# Altium PCB PCB1.PcbDoc
Units mm, origin at the board's own origin, x right, y up, seen from the top; angles counter-clockwise.
Board outline 179.79 x 227.7 mm, 2 copper layers (Top Layer, Bottom Layer); 40 components, 37 nets, 162 pads, 46 vias.
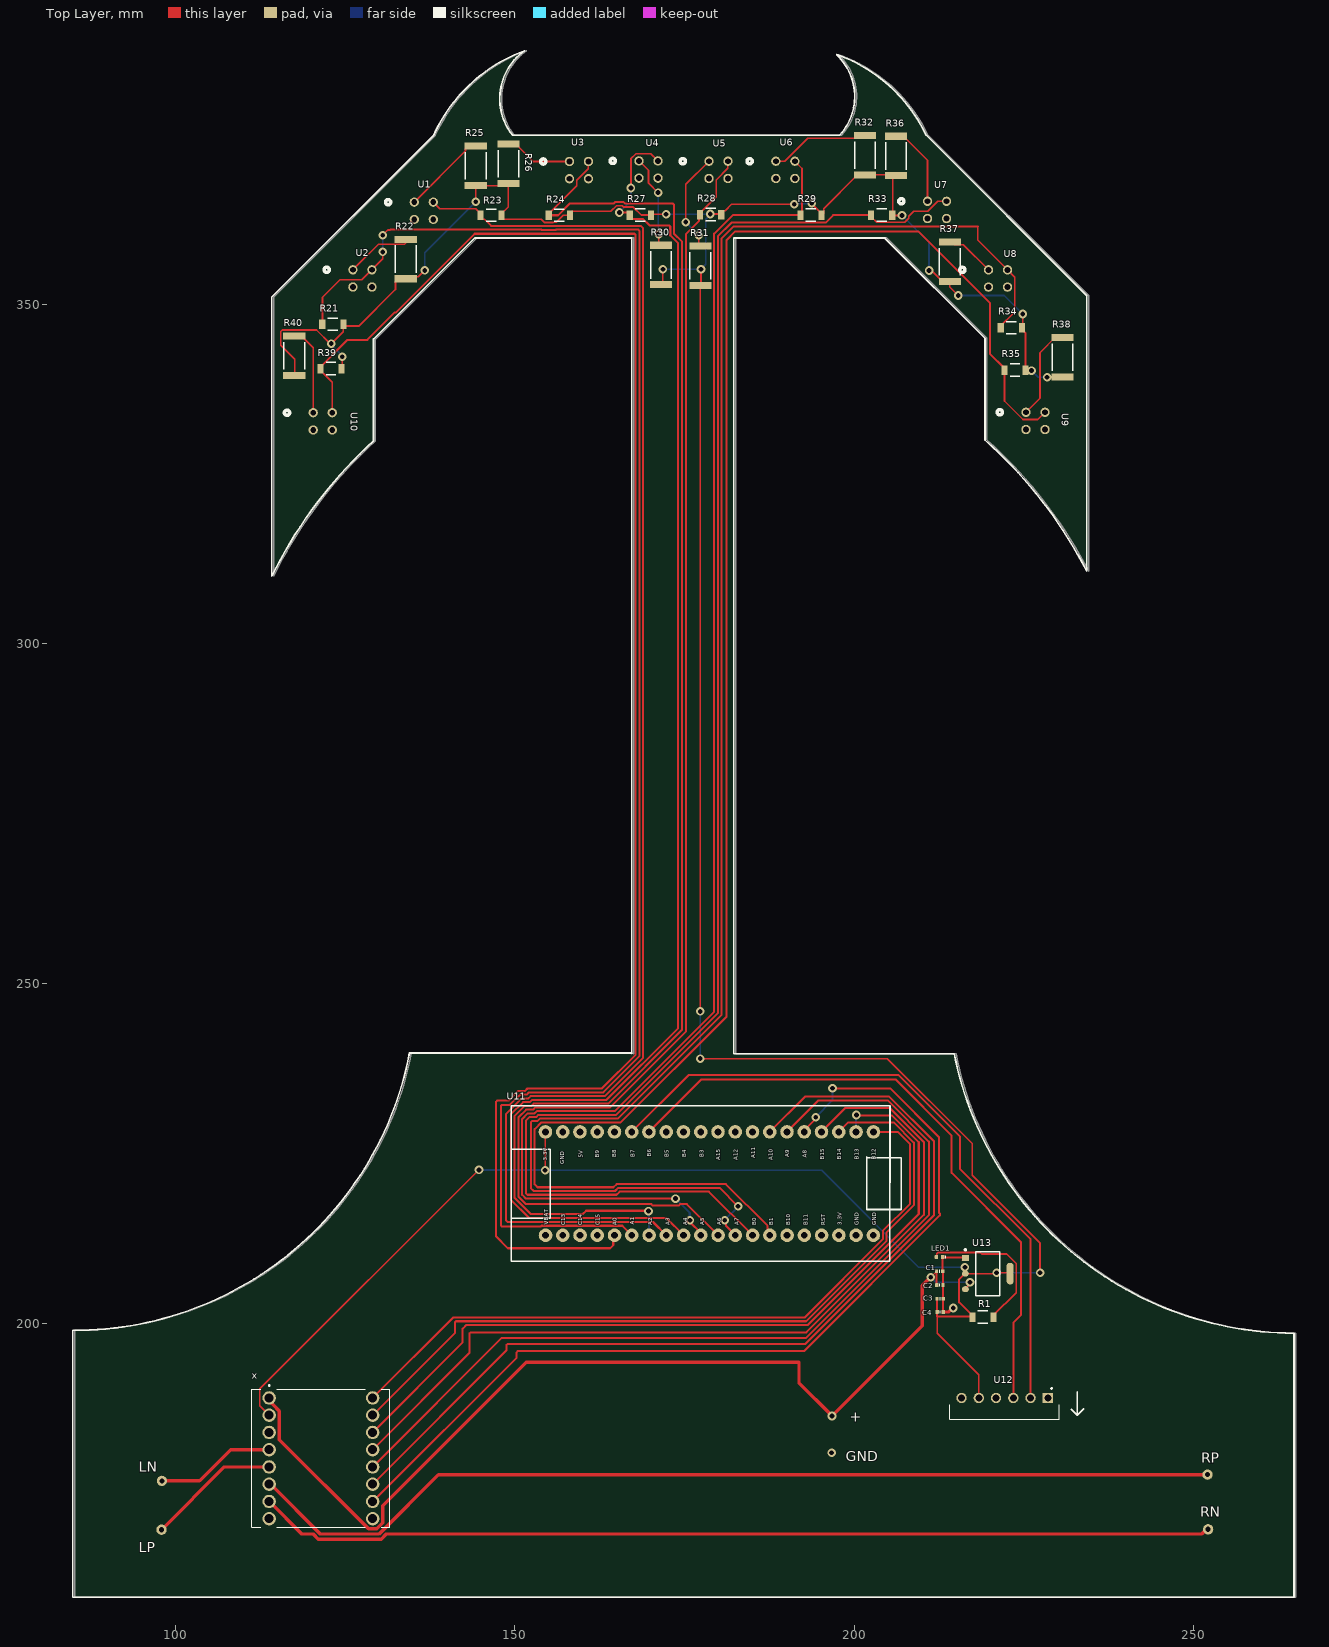
[diagram p0: Top Layer view]
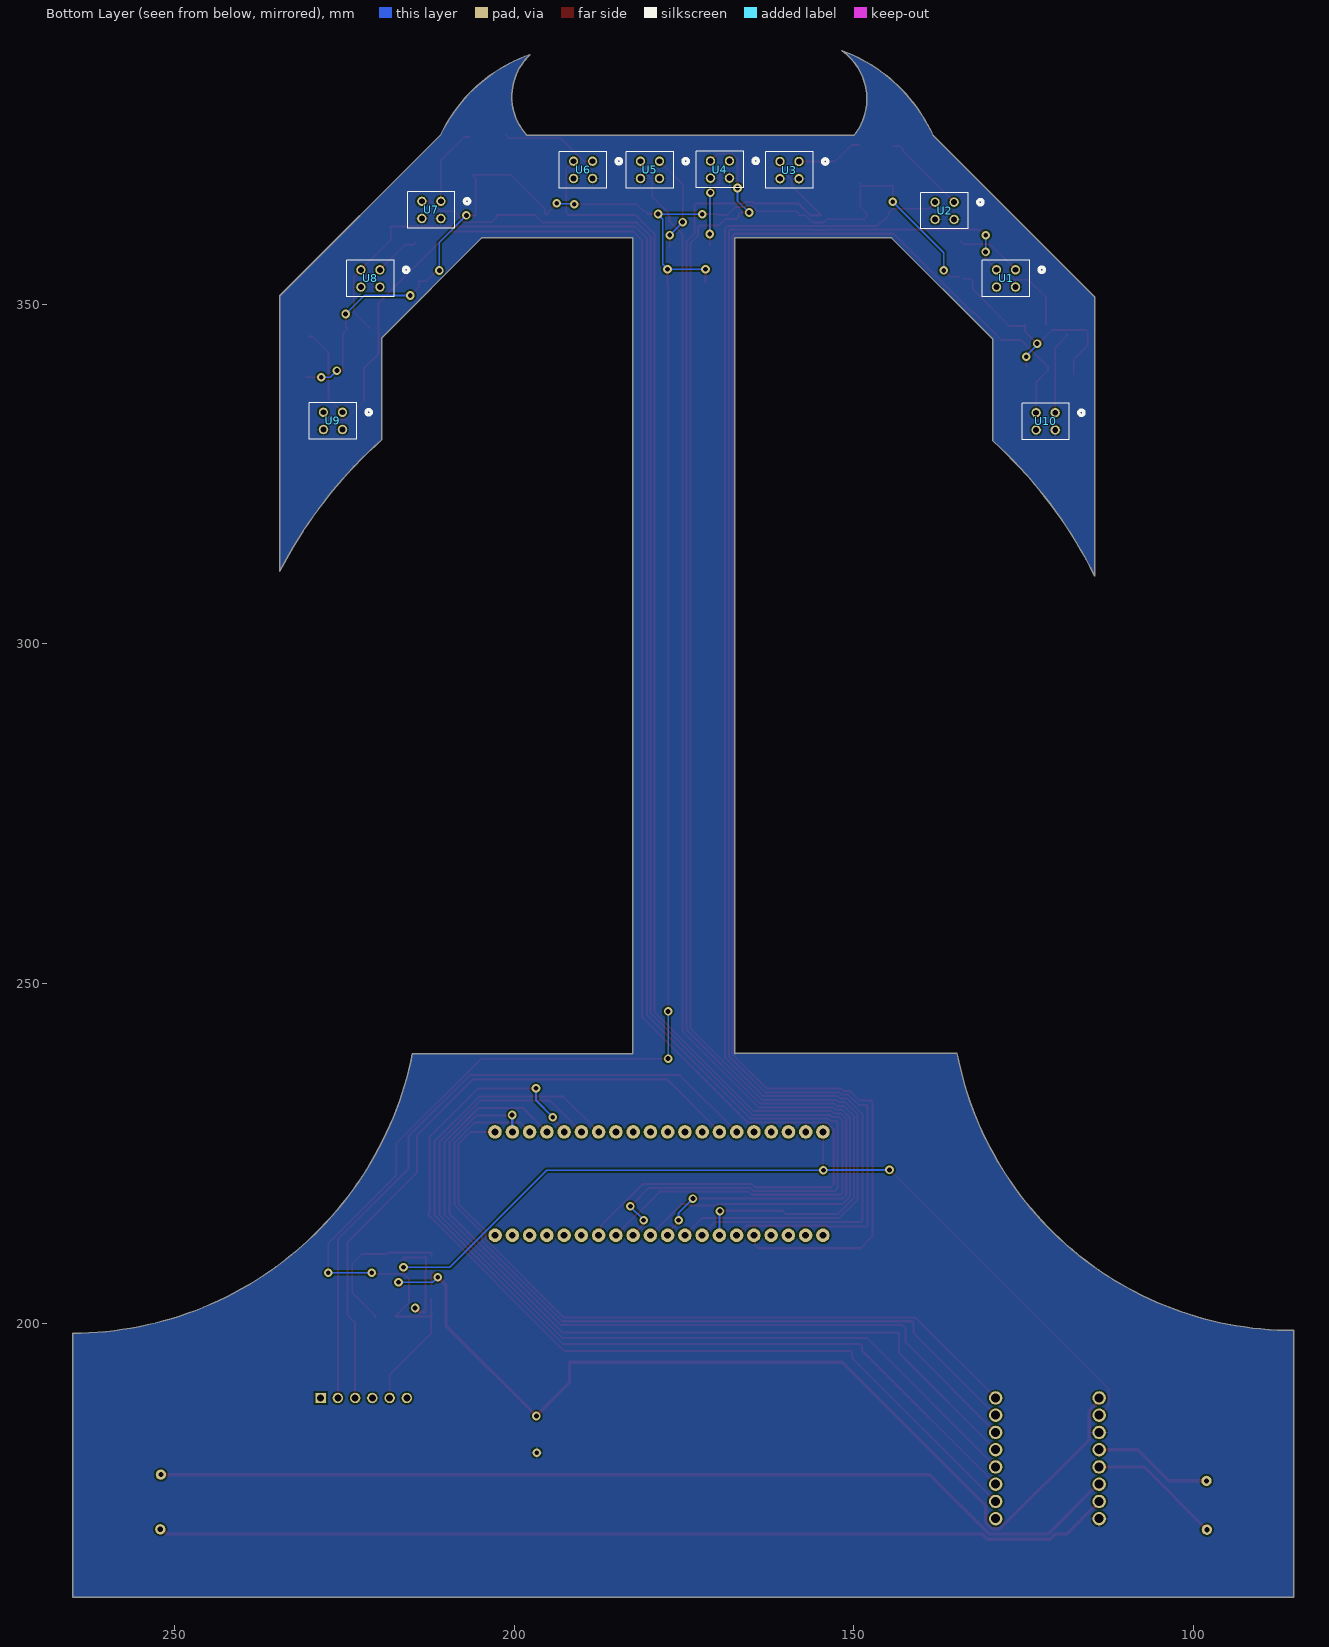
[diagram p1: Bottom Layer view, seen from below]
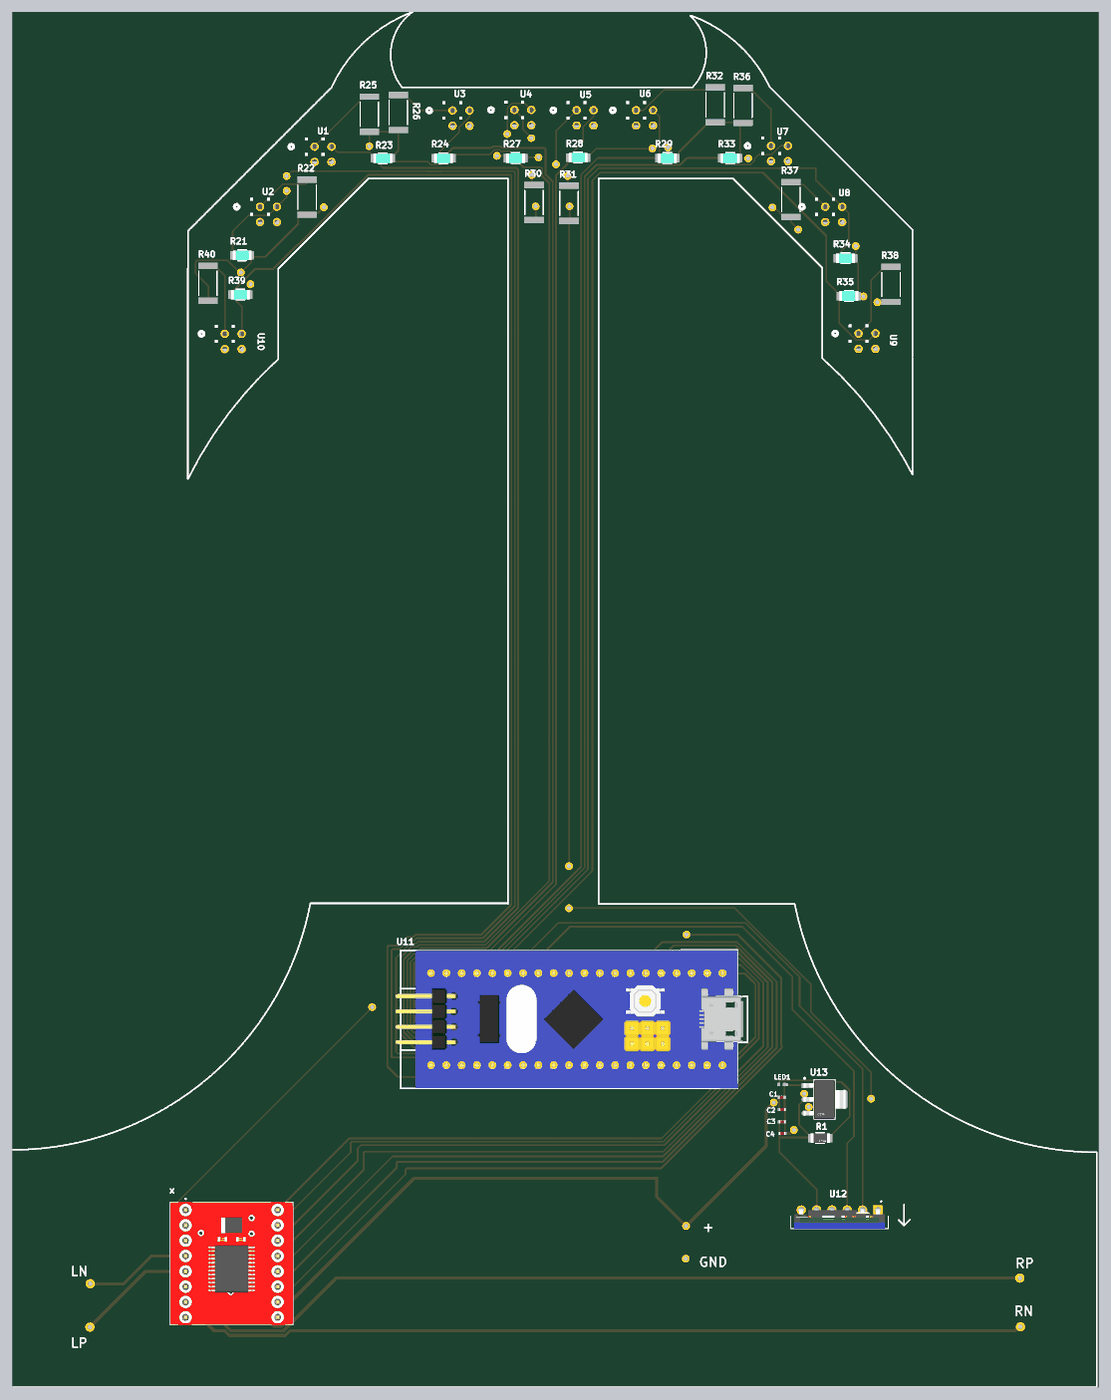
[diagram p2: 3D render of the assembled board from above, using the file's embedded part models]
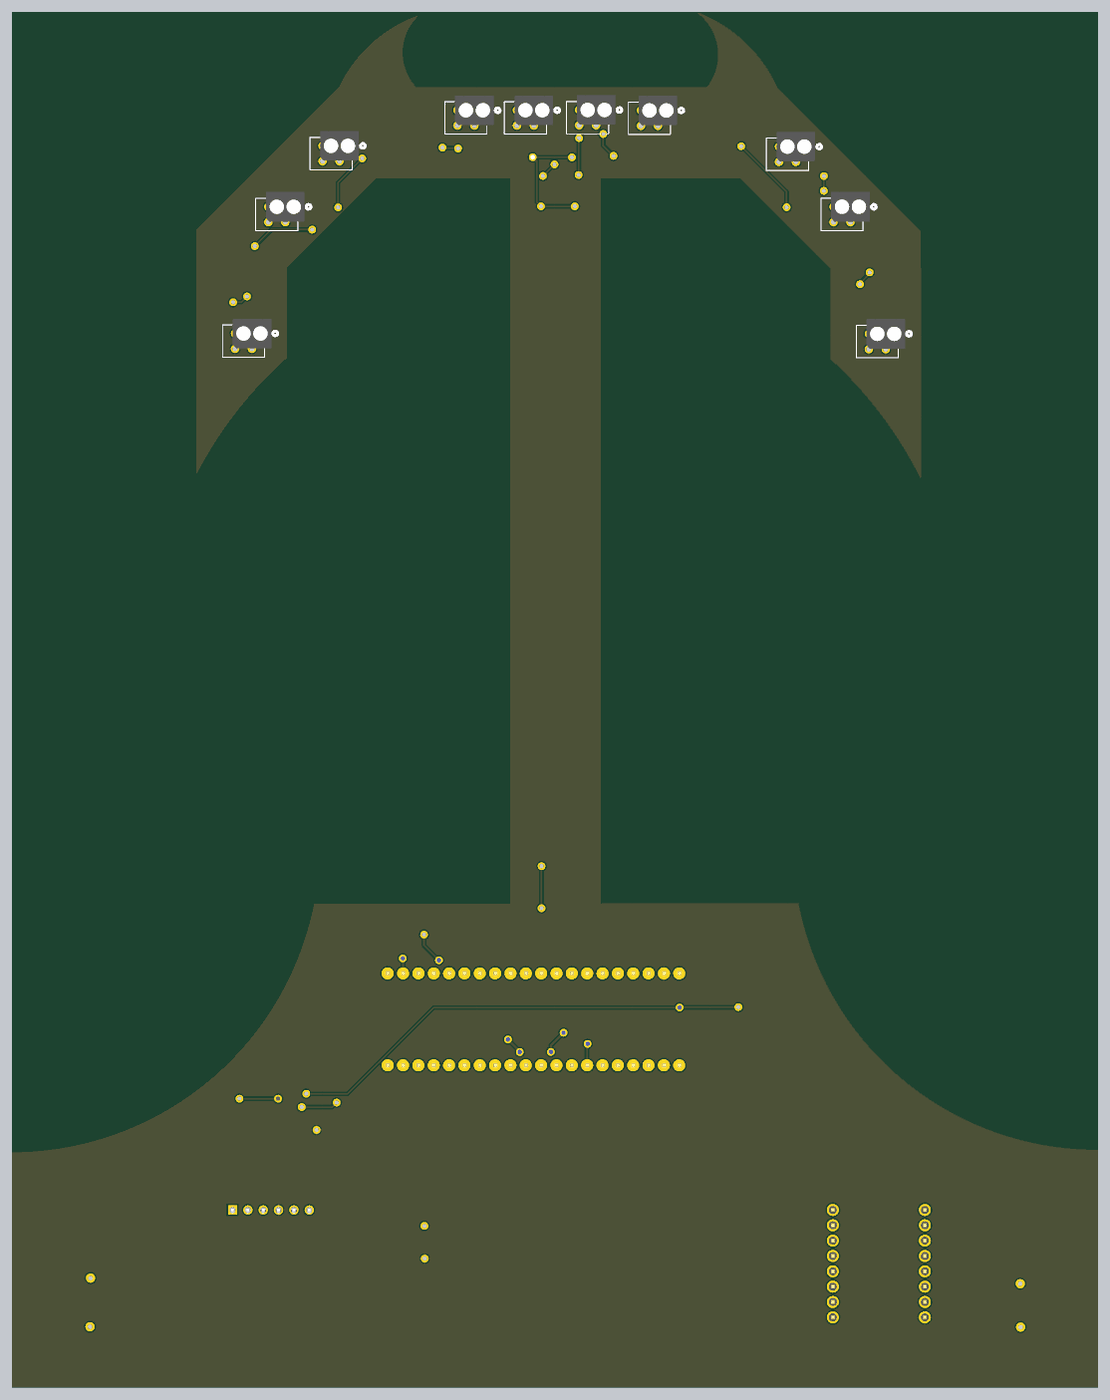
[diagram p3: 3D render of the assembled board from below, using the file's embedded part models]

## Layer stack, top to bottom
Top Solder: solder mask 0.025, SM-004, Dk 4
Top Layer: signal copper 0.0356
Dielectric 1: dielectric 0.32, FR-4, Dk 4.8
Bottom Layer: signal copper 0.0356
Bottom Solder: solder mask 0.025, SM-004, Dk 4

## Board outline
85.201,159.619 85.201,198.901 85.201,198.916 ccw(c85.373,249.25) 134.801,239.744 167.399,239.744 167.516,239.627 167.516,359.748 144.434,359.748 129.546,344.86 129.504,344.86 129.504,329.86 ccw(c175.02,279.976) 114.524,309.983 114.504,309.993 114.504,344.86 114.518,344.874 114.518,351.045 138.338,374.864 cw(c160.011,364.992) 151.73,387.322 151.734,387.31 ccw(c156.774,380.236) 149.958,374.851 198.084,374.851 198.135,374.902 ccw(c191.957,380.57) 197.672,386.705 197.689,386.752 cw(c189.998,364.999) 210.832,374.913 234.506,351.239 234.506,344.992 234.504,344.99 234.504,310.685 ccw(c175,280) 219.518,330.004 219.518,344.99 204.784,359.724 204.761,359.748 182.516,359.748 182.516,239.627 214.984,239.627 ccw(c265.112,249.618) 264.993,198.505 264.993,159.62 264.994,159.619

## Design rules (kind name [scope] priority, off if disabled: settings)
Clearance [All] p1: gap=0.254 ignorepadtopadclearanceinfootprint=FALSE
PolygonConnect [All] p1: connectstyle=Relief reliefconductorwidth=0.254 reliefentries=4 polygonreliefangle="90 Angle" airgapwidth=0.254
RoutingVias [All] p1: holewidth=0.711 width=1.27 viastyle="Through Hole" minholewidth=0.711 minwidth=1.27 maxholewidth=0.711 maxwidth=1.27
SolderMaskExpansion [All] p1: expansion=0 istentingtop=FALSE
Width [InNetClass('All Nets')] p1: maxlimit=0.5 minlimit=0.25 preferedwidth=0.3
30 further rules are at their usual default settings.

## Classes and differential pairs
component class Sheet2: R21 R22 R23 R24 R25 R26 R27 R28 R29 R30 R31 R32 R33 R34 R35 R36 R37 R38 R39 R40 U1 U3 U5 U6 U7 U8 U9 U10
component class Sheet1: C1 C2 C3 C4 R1 U12 x

## Components (designator, comment, footprint, x,y, rotation, side; value= is the part's Value field where it differs from the comment)
C1 "Capacitor 10µF +/-40% 6.3V 0402" CAPC0402(1005)60_L 212.558,207.613 r180 top value=10µF
C2 "Capacitor 100nF +/-20% 10V 0402" CAPC0402(1005)60_L 212.605,205.589 r180 top value=100nF
C3 "Capacitor 10µF +/-40% 6.3V 0402" CAPC0402(1005)60_L 212.626,203.564 r180 top value=10µF
C4 "Capacitor 100nF +/-20% 10V 0402" CAPC0402(1005)60_L 212.653,201.634 r180 top value=100nF
LED1 "QBLP595-IB" QTB-QBLP595_V 212.549,209.74 r180 top
R1 "RN73R2BTTD1001F25" FP-RN73R2B-MFG 218.926,200.877 r0 top
R21 "RN732BTTDK1002B10" FP-RN732B-MFG 123.227,347.025 r0 top value=10kR
R22 "220R 1% 2512(6432)" RESC2512(6432)_L 133.963,356.644 r90 top value="220.00 Ohm"
R23 "RN732BTTDK1002B10" FP-RN732B-MFG 146.532,363.09 r0 top value=10kR
R24 "RN732BTTDK1002B10" FP-RN732B-MFG 156.573,363.09 r0 top value=10kR
R25 "220R 1% 2512(6432)" RESC2512(6432)_L 144.271,370.384 r90 top value="220.00 Ohm"
R26 "220R 1% 2512(6432)" RESC2512(6432)_L 149.074,370.666 r90 top value="220.00 Ohm"
R27 "RN732BTTDK1002B10" FP-RN732B-MFG 168.496,363.12 r0 top value=10kR
R28 "RN732BTTDK1002B10" FP-RN732B-MFG 178.855,363.199 r0 top value=10kR
R29 "RN732BTTDK1002B10" FP-RN732B-MFG 193.609,363.12 r0 top value=10kR
R30 "220R 1% 2512(6432)" RESC2512(6432)_L 171.544,355.769 r90 top value="220.00 Ohm"
R31 "220R 1% 2512(6432)" RESC2512(6432)_L 177.332,355.64 r90 top value="220.00 Ohm"
R32 "220R 1% 2512(6432)" RESC2512(6432)_L 201.561,371.938 r90 top value="220.00 Ohm"
R33 "RN732BTTDK1002B10" FP-RN732B-MFG 204.033,363.12 r0 top value=10kR
R34 "RN732BTTDK1002B10" FP-RN732B-MFG 223.115,346.543 r0 top value=10kR
R35 "RN732BTTDK1002B10" FP-RN732B-MFG 223.666,340.294 r0 top value=10kR
R36 "220R 1% 2512(6432)" RESC2512(6432)_L 206.145,371.816 r90 top value="220.00 Ohm"
R37 "220R 1% 2512(6432)" RESC2512(6432)_L 214.065,356.255 r90 top value="220.00 Ohm"
R38 "220R 1% 2512(6432)" RESC2512(6432)_L 230.665,342.198 r90 top value="220.00 Ohm"
R39 "RN732BTTDK1002B10" FP-RN732B-MFG 122.951,340.517 r0 top value=10kR
R40 "220R 1% 2512(6432)" RESC2512(6432)_L 117.546,342.398 r90 top value="220.00 Ohm"
U1 "ITR20001/T" RELAY4_ITR20001/T_EVE 126.181,355.063 r0 bottom
U2 "ITR20001/T" RELAY4_ITR20001/T_EVE 135.223,365.017 r0 bottom
U3 "ITR20001/T" RELAY4_ITR20001/T_EVE 158.062,371.005 r0 bottom
U4 "ITR20001/T" RELAY4_ITR20001/T_EVE 168.297,371.091 r0 bottom
U5 "ITR20001/T" RELAY4_ITR20001/T_EVE 178.604,371.047 r0 bottom
U6 "ITR20001/T" RELAY4_ITR20001/T_EVE 188.446,371.042 r0 bottom
U7 "ITR20001/T" RELAY4_ITR20001/T_EVE 210.787,365.148 r0 bottom
U8 "ITR20001/T" RELAY4_ITR20001/T_EVE 219.762,355.052 r0 bottom
U9 "ITR20001/T" RELAY4_ITR20001/T_EVE 225.277,334.082 r0 bottom
U10 "ITR20001/T" RELAY4_ITR20001/T_EVE 120.344,334.024 r0 bottom
U11 "BluePill" "Stm32 BluePill" 172.91,220.31 r90 top
U12 "ZC142200" MODULE_ZC142200 222.139,188.967 r270 top
U13 "ams1117" FP-ams1117-IPC_C 219.646,207.279 r0 top
x "ROB-14450" MODULE_ROB-14450 121.482,180.083 r0 top

## Footprints (in the part's own frame and the unit in brackets; to place one, negate y for a bottom-side part, rotate by r counter-clockwise, add the part's x,y. Pads: shape width x height; smd on the part's side, far side on the other; paste and mask are expansions set on the pad)
CAPC0402(1005)60_L [mm] "Chip Capacitor, Body 1.0x0.5mm, Height 0.6mm, IPC High Density"
  rrect25% 0.5x0.55 smd: 1(-0.45,0) 2(0.45,0)
  silkscreen extent 0,-0.2 0,0.2, body extent -0.5,-0.25 0.5,0.25, height 0.6
FP-ams1117-IPC_C [mm]
  rect 1.004x0.872 smd paste+0 mask+0: 1(-3.295,2.29)
  rrect100% 1.004x0.872 smd paste+0 mask+0: 2(-3.295,0) 3(-3.295,-2.29)
  rrect87% 1.004x3.182 smd paste+0 mask+0: 4(3.295,0)
  silkscreen extent -3.42,-3.25 1.75,3.62, body extent -3.9,-3.35 3.9,3.35, height 0.25
FP-RN73R2B-MFG [mm]
  rect 0.9x1.4 smd paste+0 mask+0: 1(-1.55,0) 2(1.55,0)
  silkscreen extent -0.72,-0.9 0.72,0.9, body extent -2.1,-1 2.1,1, height 0.25
FP-RN732B-MFG [mm]
  rect 0.9x1.4 smd paste+0 mask+0: 1(-1.55,0) 2(1.55,0)
  silkscreen extent -0.72,-0.9 0.72,0.9, body extent -2.1,-1 2.1,1, height 0.25
MODULE_ROB-14450 [mm]
  round 1.98 hole 1.32: 1(-7.62,8.89) 2(-7.62,6.35) 3(-7.62,3.81) 4(-7.62,1.27) 5(-7.62,-1.27) 6(-7.62,-3.81) 7(-7.62,-6.35) 8(-7.62,-8.89) 9(7.62,-8.89) 10(7.62,-6.35) 11(7.62,-3.81) 12(7.62,-1.27) 13(7.62,1.27) 14(7.62,3.81) 15(7.62,6.35) 16(7.62,8.89)
  silkscreen extent -10.16,-10.16 10.16,10.83, body extent -10.16,-10.16 10.16,10.16, height 5.5
MODULE_ZC142200 [mm]
  rect 1.53x1.53 / inner round 1.53 / far side rect 1.53x1.53 hole 1.02: 1(0,6.35)
  round 1.53 hole 1.02: 2(0,3.81) 3(0,1.27) 4(0,-1.27) 5(0,-3.81) 6(0,-6.35)
  silkscreen extent -1.5,-8.05 3.1,8.05, body extent -0.31,-7.5 3.1,7.5, height 37
QTB-QBLP595_V [mm] "SMD, 2-Leads, Body 1x0.5mm"
  rrect25% 0.5x0.55 smd: 1(-0.455,0) 2(0.455,0)
  silkscreen extent -0.9,-0.2 -0.9,0.2, body extent -0.5,-0.25 0.5,0.25, height 0.5
RELAY4_ITR20001/T_EVE [mil]
  round 54 hole 34: 1(0,0) 2(0,100) 3(110.24,100) 4(110.24,0)
  silkscreen extent -167,-55 192,156, body extent -126,-96 126,96, height 268
RESC2512(6432)_L [mm] "Chip Resistor, Body 6.4x3.2mm, IPC High Density"
  rect 1.05x3.25 smd: 1(-2.9,0) 2(2.9,0)
  silkscreen extent -2,-1.52 2,1.53, body extent -3.25,-1.7 3.25,1.7, height 0.75
"Stm32 BluePill" [mm]
  round 2 hole 1: 1(7.828,-29.908) 2(7.828,-27.343) 3(7.828,-24.803) 4(7.828,-22.263) 5(7.828,-19.723) 6(7.828,-17.183) 7(7.828,-14.643) 8(7.828,-12.103) 9(7.828,-9.563) 10(7.828,-7.023) 11(7.828,-4.483) 12(7.828,-1.943) 13(7.828,0.597) 14(7.828,3.137) 15(7.828,5.677) 16(7.828,8.217) 17(7.828,10.757) 18(7.828,13.297) 19(7.828,15.837) 20(7.828,18.377) 21(-7.386,18.366) 22(-7.386,15.826) 23(-7.386,13.286) 24(-7.386,10.746) 25(-7.386,8.206) 26(-7.386,5.666) 27(-7.386,3.126) 28(-7.386,0.586) 29(-7.386,-1.954) 30(-7.386,-4.494) 31(-7.386,-7.034) 32(-7.386,-9.574) 33(-7.386,-12.114) 34(-7.386,-14.654) 35(-7.386,-17.194) 36(-7.386,-19.734) 37(-7.386,-22.274) 38(-7.386,-24.814) 39(-7.386,-27.354) 40(-7.386,-29.894)
  silkscreen extent -11.22,-34 11.69,23.43, body extent -11.18,-33.27 11.68,24.29, height 12.31

## Part data
C1 C3: library part CMP-001-00074-3, "Chip Capacitor, 10µF +/-40%, 6.3V, 0402, Thickness 0.6 mm", Case/Package=0402, Max Operating Temperature=85°C, Min Operating Temperature=-55°C, Tolerance=10%, Voltage Rating=6.3V, Mounting Technology=SMT, Pins=2
C2 C4: library part CMP-001-00061-3, "Chip Capacitor, 100nF +/-20%, 10V, 0402, Thickness 0.6 mm", Case/Package=0402, Max Operating Temperature=85°C, Min Operating Temperature=-55°C, Tolerance=20%, Voltage Rating=10V, Mounting Technology=SMT, Pins=2
LED1: library part CMP-007-00042-3, "Chip LED 0402, Blue, 0.02 A, 3.1 to 3.7 V, -40 to 80 degC, 2-Pin SMD, RoHS, Tape and Reel", Case/Package=0402, Colour=Blue, Mounting Technology=SMT, Pins=2, RoHS Compliant=Yes
R1: library part CMP-04015-029161-1, "1kΩ ±1% 0.25W, 1/4W Chip Resistor 1206 (3216 Metric) Moisture Resistant Thin Film"
R21 R23 R24 R27 R28 R29 R33 R34 R35 R39: library part CMP-04015-036251-1, "10kΩ ±0.1% 0.125W, 1/8W Chip Resistor 1206 (3216 Metric) Moisture Resistant Thin Film", Case Code (Imperial)=1206, Case Code (Metric)=3216, Max Operating Temperature=125°C, Min Operating Temperature=-55°C, Power Rating=125mW, Resistance=10kR, Temperature Coefficient=10ppm/°C, Tolerance=0.1%, Voltage Rating=150V, Case/Package=1206, Composition="Thin Film", Height=0.6mm, Length=3.2mm, Packaging="Tape and Reel", Termination=SMD/SMT, Voltage Rating (DC)=150V, Weight=0.000571oz, Width=1.6mm
R22 R25 R26 R30 R31 R32 R36 R37 R38 R40: library part CMP-1018-00433-1, "220R 1W 1% 2512 (6432 Metric)  SMD", Case-EIA=2512, Case-Metric=6432, Power="1 W", Tolerance="1 %", Technology=SMT
U1 U2 U3 U4 U5 U6 U7 U8 U9 U10: library part CMP-005-000000-1, "Reflective Optical Sensor 0.197 (5mm) 4-DIP (0.100, 2.54mm)", Package="DIP-4 Everlight", Check_prices=https://www.snapeda.com/parts/ITR20001/T/Everlight/view-part/?ref=eda, Component Type=Standard, Design Item ID=ITR20001/T, MF="Everlight Electronics", MP=ITR20001/T, Pin Count=4, SnapEDA_Link=https://www.snapeda.com/parts/ITR20001/T/Everlight/view-part/?ref=snap, Source=ITR20001_T.SchLib
U11: library part CMP-00030-00001-1, "Designed By @Alixahedi", Component Type=Standard, Design Item ID=BluePill, Pins=40, Source=Schlib1.SchLib
U12: library part CMP-011-000000-1, "1pc HC-05 6 Pin Wireless Bluetooth RF Transceiver Module Serial For Arduino", Package=None, Check_prices=https://www.snapeda.com/parts/ZC142200/YKS/view-part/?ref=eda, Component Type=Standard, Design Item ID=ZC142200, MF=YKS, MP=ZC142200, Pin Count=6, SnapEDA_Link=https://www.snapeda.com/parts/ZC142200/YKS/view-part/?ref=snap, Source=ZC142200.SchLib
U13: library part CMP-209535-000002-1, "1A LOW DROPOUT VOLTAGE REGULATOR", RoHS Compliant=Yes
x: library part CMP-009-000000-1, "TB6612FNG Motor Controller/Driver Power Management Evaluation Board", Package=None, Availability="In Stock", Check_prices=https://www.snapeda.com/parts/ROB-14450/SparkFun%20Electronics/view-part/2656367/?ref=eda, Component Type=Standard, Design Item ID=ROB-14450, MF="SparkFun Electronics", MP=ROB-14450, Pin Count=16, Price=None, SnapEDA_Link=https://www.snapeda.com/parts/ROB-14450/SparkFun%20Electronics/view-part/2656367/?ref=snap, Source=ROB-14450.SchLib

## Free pads (board coordinates)
  round 1.524 hole 0.762: 2(98.07,176.761) 3(98.012,169.575) 4(252.001,177.693) 5(252.086,169.632)

## Via types
v1: diameter 1.27, hole 0.711, Top Layer to Bottom Layer, 46 vias

## Nets (pads, with @x,y where several pads share a name; then routed paths per layer and width w, separated by ;. In a path a pad name is that pad's centre, name@x,y a point inside that pad or via, vN(x,y) a via of type N, cw(c..) or ccw(c..) an arc to the next point about the centre after c; other vN are vias at no path point)
+IN: C1.2 C2.2 U13.3 x.1 | length 147.1
  Top Layer w0.25: v1(211.249,206.753) 211.274,206.753 212.108,207.588 C1.2 ; U13.3@216.367,205.207 216.467,205.207 217.031,205.772 v1(217.031,206.008)
  Top Layer w0.3: C1.2 212.132,207.59 C2.2@212.132,205.612
  Top Layer w0.5: x.1 113.862,188.573 114.379,188.056 114.379,188.029 115.356,187.052 115.356,182.826 128.483,169.699 129.721,169.699 130.596,170.574 130.596,173.114 151.688,194.206 191.854,194.206 191.854,191.19 196.65,186.393 v1@196.722,186.393 ; v1(196.722,186.322) 210.031,199.631 210.031,205.536 211.22,206.725 v1@211.22,206.77
  Bottom Layer w0.25: v1(211.249,206.753) 211.994,206.008 v1(217.031,206.008)
+Out: C3.2 C4.2 R1.1 R21.2 R22.1 R23.2 R24.2 R25.1 R26.1 R27.2 R28.2 R29.2 R30.1 R31.1 R32.1 R33.2 R34.2 R35.2 R36.1 R37.1 R38.1 R39.2 R40.1 U11.20 U12.5 U13.2 U13.4 x.2 | length 555.7
  Top Layer w0.25: x.2 112.493,187.802 112.493,190.304 v1(144.74,222.55) ; R40.1@117.617,339.638 117.617,341.901 115.542,343.976 115.542,345.98 115.764,346.202 120.815,346.202 122.825,344.192 v1(123.007,344.192) 124.777,345.962 R21.2 ; R39.2@124.459,340.771 124.607,340.918 v1(124.607,342.247) ; R21.2@124.731,346.774 127.066,346.774 132.463,352.171 132.463,353.344 132.863,353.744 R22.1 ; R22.1@134.396,354.007 134.431,354.042 135.816,354.042 v1(136.754,354.979) ; v1(144.271,365.072) R25.1 ; R25.1@144.271,367.438 148.746,367.438 R26.1 ; R23.2 148.082,363.34 149.046,364.304 R26.1@149.046,367.419 ; R23.2@148.161,362.921 148.161,362.761 148.407,362.515 153.912,362.515 154.416,362.011 155.63,362.011 155.669,362.05 156.11,362.05 157.15,363.09 R24.2 ; v1(154.477,222.49) 154.505,222.518 154.505,228.11 U11.20 ; R24.2@158.203,363.338 158.203,363.42 158.448,363.665 164.151,363.665 164.99,364.504 165.83,364.504 166.043,364.291 167.46,364.291 168.632,363.12 R27.2 170.166,363.239 v1(172.295,363.239) ; R30.1@171.779,353.167 171.822,353.209 v1(171.822,355.133) ; v1(177.332,238.926) 204.86,238.926 217.351,226.435 217.351,221.766 227.353,211.765 v1(227.353,207.399) ; v1(177.332,245.89) R31.1 ; R31.1@177.424,352.744 v1(177.424,355.133) ; v1(178.795,363.267) 180.479,363.267 R28.2@180.492,363.28 ; R28.2 180.405,363.449 180.73,363.774 180.98,363.774 181.916,364.71 v1(191.148,364.71) ; v1(193.737,364.855) 193.737,364.792 195.077,363.452 R29.2@195.077,363.171 ; R29.2@195.263,363.133 195.484,363.354 195.484,364.061 200.461,369.038 R32.1 206.078,369.038 R36.1@206.107,369.009 ; R33.2@205.612,363.065 v1(207.023,363.065) ; R33.2@205.646,363 205.646,368.516 206.046,368.916 R36.1 ; v1(211.007,354.962) 211.202,354.767 211.553,354.767 212.965,353.355 R37.1 ; C3.2 212.189,203.551 212.189,201.622 C4.2@212.203,201.609 ; 212.203,200.955 212.203,198.524 218.329,192.398 U12.5 ; R37.1@214.052,353.393 214.052,352.521 v1(215.298,351.275) ; v1(216.281,208.22) 216.316,208.185 216.316,207.315 U13.2 v1@220.952,207.28 ; v1(220.952,207.399) 222.771,207.399 U13.4@222.933,207.237 ; R34.2@224.606,346.593 224.606,346.352 225.216,345.741 R35.2 ; R34.2 224.804,346.681 v1(224.804,348.551) ; R35.2@225.215,340.211 v1(226.096,340.211) ; v1(228.391,339.244) 230.611,339.244 R38.1
  Top Layer w0.3: C4.2@212.203,201.609 212.203,200.955 217.298,200.955 R1.1 217.376,201.127 215.445,203.058 215.445,206.439 216.285,207.28 U13.2
  Bottom Layer w0.25: v1(123.007,344.192) 123.007,344.019 124.607,342.42 v1(124.607,342.247) ; v1(136.754,354.979) 136.754,357.555 v1(144.271,365.072) ; v1(144.74,222.55) 144.77,222.52 154.446,222.52 v1(154.477,222.49) 195.187,222.49 209.458,208.22 v1(216.281,208.22) ; v1@171.758,355.069 v1(171.822,355.133) v1(177.424,355.133) 177.424,355.187 178.111,355.874 178.111,362.523 178.795,363.207 v1(178.795,363.267) 178.782,363.253 172.308,363.253 v1(172.295,363.239) ; v1(177.332,238.926) v1(177.332,245.89) ; v1(191.148,364.71) 191.221,364.782 193.665,364.782 v1(193.737,364.855) ; v1(207.023,363.065) 211.007,359.081 v1(211.007,354.962) ; v1(215.298,351.275) 222.08,351.275 v1(224.804,348.551) ; v1@220.865,207.277 220.848,207.294 v1(220.952,207.399) v1(227.353,207.399) ; v1(226.096,340.211) 227.063,339.244 v1(228.391,339.244)
-IN: C1.1 C2.1 C3.1 C4.1 LED1.1 U1.2 U1.3 U2.2 U2.3 U3.2 U3.3 U4.2 U4.3 U5.2 U5.3 U6.2 U6.3 U7.2 U7.3 U8.2 U8.3 U9.2 U9.3 U10.2 U10.3 U11.19 U12.4 U13.1 x.3 x.8 | length 16.4
  Top Layer w0.25: U1.3@128.715,352.523 U1.3@128.752,352.486 ; U11.19@156.746,227.811 U11.19 ; LED1.1@213.004,209.715 LED1.1 ; U13.1@215.886,209.258 216.04,209.258 U13.1 ; U13.1@216.274,209.664 U13.1@216.679,209.258 ; U9.2@225.503,331.549 U9.2@225.51,331.542 ; U9.3@228.123,331.608 U9.3@228.143,331.608
  Top Layer w0.3: LED1.1 LED1.1@213.006,209.738 ; C2.1 213.032,205.612 213.032,207.59 C1.1 213.006,207.616 LED1.1@213.006,209.738 ; C2.1@213.076,205.605 C3.1 213.076,201.66 C4.1 ; U13.1@216.266,209.655 213.089,209.655 LED1.1@213.006,209.738
  Top Layer w0.5: C4.1 213.93,201.634 214.513,202.218 v1(214.578,202.218)
  Bottom Layer w0.25: U2.2@135.223,362.278 U2.2@135.421,362.476 ; U3.2@157.859,368.262 U3.2@157.859,368.362 ; U3.3 U3.3@160.905,368.508 ; U4.2@168.049,368.508 U4.2@168.308,368.768 ; U4.3 U4.3@171.119,368.529 ; U5.2@178.374,368.529 U5.2@178.433,368.47 ; U5.3 U5.3@181.406,368.505 ; U6.2@188.363,368.505 U6.2@188.37,368.497 ; U6.3@190.984,368.502 U6.3@191.016,368.471 ; U7.2@210.618,362.638 U7.2@210.618,362.777 ; U8.2@219.411,352.864 U8.2@219.718,352.864 ; U9.2@225.118,331.533 U9.2@225.126,331.542 ; U9.3@227.899,331.668 U9.3@227.899,331.72
  other v1: 196.667,180.918
AI1: U11.2 x.14 | length 118.8
  Top Layer w0.3: x.14 142.353,197.144 142.353,199.185 142.878,199.71 193.143,199.71 209.49,216.057 209.49,226.629 205.538,230.581 200.345,230.581 v1(200.304,230.622)
  Bottom Layer w0.3: v1(200.253,228.138) 200.278,228.164 200.278,230.597 v1(200.304,230.622)
AI2: U11.3 x.15 | length 116.2
  Top Layer w0.3: x.15 141.193,198.524 141.193,200.088 141.369,200.264 192.913,200.264 204.762,212.112 204.762,213.348 208.762,217.349 208.762,226.574 205.794,229.542 199.117,229.542 U11.3
BI1: U11.6 x.12 | length 133.4
  Top Layer w0.3: x.12 148.109,197.82 192.918,197.82 210.978,215.881 210.978,226.708 204.912,232.774 194.729,232.774 U11.6
BI2: U11.7 x.11 | length 139.4
  Top Layer w0.3: x.11 148.787,195.958 148.787,196.763 148.962,196.939 192.82,196.939 211.728,215.847 211.728,226.741 205.142,233.328 192.743,233.328 U11.7
LN: pad.2 x.4 | length 17.6
  Top Layer w0.5: pad.2 103.608,176.761 108.201,181.353 113.692,181.353 x.4@113.772,181.273
LP: pad.3 x.5 | length 19.8
  Top Layer w0.5: pad.3 107.251,178.813 113.95,178.813 x.5@113.985,178.777
NetLED1_2: LED1.2 R1.2 | length 22.2
  Top Layer w0.25: LED1.2 212.129,209.775 212.129,210.223 212.299,210.394 218.534,210.394 218.765,210.163 222.431,210.163 223.822,208.772 223.822,204.474 220.476,201.127 R1.2
NetR21_1: R21.1 U1.4 U11.26 | length 239.3
  Top Layer w0.25: 121.706,351.004 124.29,353.588 127.506,353.588 U1.4 130.591,356.673 v1(130.591,357.695) ; v1(130.576,360.152) 131.338,360.914 131.633,360.914
  Top Layer w0.3: R21.1 121.677,350.938 ; 131.706,360.967 153.929,360.967 153.968,360.928 156.079,360.928 156.118,360.967 168.195,360.967 168.371,360.791 168.371,239.286 163.059,233.974 152.115,233.974 151.776,233.635 150.784,233.635 149.284,232.134 148.14,232.134 147.964,231.958 147.964,214.379 148.14,214.204 153.838,214.204 153.962,214.327 165.84,214.327 U11.26
  Bottom Layer w0.25: v1(130.576,360.152) 130.583,360.144 130.583,357.703 v1(130.591,357.695)
NetR22_2: R22.2 U1.1 | length 10
  Top Layer w0.25: U1.1 126.212,355.063 126.239,355.09 126.239,355.121 129.944,358.826 133.782,358.826 R22.2@134.394,359.438
NetR23_1: R23.1 U2.4 U11.28 | length 218.5
  Top Layer w0.25: U2.4 138.982,364.058 144.264,364.058 144.861,363.462 R23.1@144.861,363.266 ; R23.1 144.982,362.84 145.307,362.515 145.557,362.515 146.551,361.521
  Top Layer w0.3: 146.551,361.521 154.158,361.521 154.197,361.482 155.849,361.482 155.888,361.521 168.556,361.521 168.925,361.151 168.925,239.057 163.288,233.42 152.345,233.42 152.006,233.081 151.014,233.081 148.691,230.758 148.691,215.161 148.97,214.882 170.365,214.882 U11.28
NetR24_1: R24.1 U3.4 U11.27 | length 218.3
  Top Layer w0.25: R24.1@154.797,363.029 154.797,363.114 159.127,367.443 159.127,368.236 160.835,369.944 160.835,370.979 U3.4
  Top Layer w0.3: R24.1 156.402,363.09 158.132,364.82 164.558,364.82 164.771,365.033 166.049,365.033 166.262,364.82 173.283,364.82 173.459,364.645 173.459,360.378 174.651,359.186 174.651,243.215 163.747,232.312 152.804,232.312 152.465,231.973 151.473,231.973 149.996,230.496 149.996,218.405 152.351,216.05 160.024,216.05 160.509,216.535 169.641,216.535 v1(169.702,216.475)
  Bottom Layer w0.3: v1(169.702,216.475) 169.784,216.393 v1(169.784,212.923)
NetR25_2: R25.2 U2.1 | length 12.7
  Top Layer w0.25: U2.1 142.771,372.565 142.771,372.884 143.144,373.257 R25.2@144.306,373.257
NetR26_2: R26.2 U3.1 | length 10
  Top Layer w0.25: R26.2@149.104,373.432 150.308,373.432 152.735,371.005 U3.1
NetR27_1: R27.1 U4.4 U11.29 | length 210.3
  Top Layer w0.25: v1(165.41,363.49) 166.712,363.49 R27.1@166.968,363.235 ; v1(167.113,367.108) 167.113,371.414 167.856,372.156 170.032,372.156 U4.4
  Top Layer w0.3: R27.1 166.946,362.87 167.246,362.57 168.874,362.57 169.866,361.578 172.729,361.578 172.905,361.402 172.905,360.148 174.06,358.993 174.06,243.408 163.518,232.866 152.574,232.866 152.235,232.527 151.243,232.527 149.442,230.726 149.442,218.176 152.182,215.436 172.351,215.436 U11.29
  Bottom Layer w0.25: v1(165.41,363.49) 167.113,365.193 v1(167.113,367.108)
NetR28_1: R28.1 U5.4 U11.31 | length 204.2
  Top Layer w0.25: R28.1@177.329,363.198 177.329,363.473 179.669,365.813 179.669,368.278 181.377,369.986 181.377,371.021 U5.4
  Top Layer w0.3: R28.1@177.361,363.199 177.121,362.96 177.121,362.225 175.205,360.309 175.205,242.909 164.053,231.758 153.033,231.758 152.694,231.419 151.702,231.419 150.55,230.267 150.55,218.635 151.671,217.514 170.132,217.514 170.369,217.277 174.116,217.277 174.353,217.514 175.353,217.514 U11.31
NetR29_1: R29.1 U6.4 U11.30 | length 212.3
  Top Layer w0.25: U6.4 192.311,369.977 192.311,363.421 R29.1@192.214,363.325
  Top Layer w0.3: v1(173.686,218.316) 173.669,218.333 151.635,218.333 151.104,218.864 151.104,230.037 151.932,230.865 152.924,230.865 153.263,231.204 164.714,231.204 179.361,245.851 179.361,360.365 182.116,363.12 R29.1 ; v1(175.788,215.143) 175.788,214.88 177.404,213.265 U11.30
  Bottom Layer w0.3: v1(173.686,218.316) 175.775,216.228 175.775,215.156 v1(175.788,215.143)
NetR30_2: R30.2 U4.1 | length 13.6
  Top Layer w0.25: U4.1 169.714,369.674 169.714,367.822 v1(171.112,366.424) ; R30.2@171.08,358.718 171.193,358.831 v1(171.193,360.321)
  Bottom Layer w0.25: v1(171.112,366.424) 171.152,366.383 171.152,360.361 v1(171.193,360.321)
NetR31_2: R31.2 U5.1 | length 14.8
  Top Layer w0.25: v1(175.188,362.074) 175.188,367.632 U5.1 ; v1(177.097,360.164) 177.097,358.505 R31.2@177.169,358.433
  Bottom Layer w0.25: v1(175.188,362.074) v1(177.097,360.164)
NetR32_2: R32.2 U6.1 | length 14.4
  Top Layer w0.25: U6.1 189.74,371.042 193.136,374.438 200.693,374.438 R32.2@201.196,374.941
NetR33_1: R33.1 U7.4 U11.33 | length 233.2
  Top Layer w0.25: R33.1@202.599,363.12 202.599,362.753 203.312,362.041 207.138,362.041 207.148,362.051 207.443,362.051 208.037,362.645 208.037,362.94 208.77,363.673 210.818,363.673 212.293,365.148 U7.4
  Top Layer w0.3: U11.33 178.592,219.355 165.462,219.355 164.994,218.887 151.865,218.887 151.658,219.094 151.658,229.808 152.161,230.311 153.153,230.311 153.492,230.65 164.944,230.65 179.915,245.622 179.915,360.008 181.923,362.016 195.777,362.016 196.881,363.12 R33.1
NetR34_1: R34.1 U8.4 U11.32 | length 253
  Top Layer w0.25: 218.173,361.463 218.173,359.441 U8.4 223.627,353.988 223.627,348.855 221.36,346.588 R34.1@221.36,346.502
  Top Layer w0.3: v1(180.934,215.125) 181.12,214.94 181.12,214.287 U11.32 ; v1(182.888,217.208) 182.863,217.208 180.162,219.909 165.233,219.909 164.765,219.441 152.802,219.441 152.391,219.852 152.391,229.581 152.567,229.757 153.383,229.757 153.722,230.096 165.173,230.096 180.469,245.392 180.469,359.686 182.245,361.462 218.215,361.462
  Bottom Layer w0.3: v1(180.934,215.125) 180.934,215.19 182.888,217.144 v1(182.888,217.208)
NetR35_1: R35.1 U9.4 U11.34 | length 262.8
  Top Layer w0.25: R35.1@222.102,340.499 222.102,335.751 224.836,333.017 227.012,333.017 U9.4
  Top Layer w0.3: U11.34 187.238,213.249 187.238,214.328 181.103,220.463 165.003,220.463 164.535,219.995 153.358,219.995 152.945,220.408 152.945,228.536 153.951,229.542 165.274,229.542 165.316,229.5 165.564,229.5 181.184,245.12 181.184,359.42 182.485,360.722 209.419,360.722 219.946,350.195 219.946,342.714 R35.1@222.116,340.544
NetR36_2: R36.2 U7.1 | length 11.7
  Top Layer w0.25: R36.2@206.55,374.617 207.345,374.617 210.787,371.174 U7.1
NetR37_2: R37.2 U8.1 | length 6.9
  Top Layer w0.25: R37.2@214.472,359.055 214.771,358.755 216.06,358.755 U8.1
NetR38_2: R38.2 U9.1 | length 13.4
  Top Layer w0.25: U9.1 227.328,336.133 227.328,342.861 229.702,345.235 R38.2@230.162,345.235
NetR39_1: R39.1 U10.4 U11.25 | length 245.9
  Top Layer w0.25: R39.1 121.401,340.267 123.144,338.524 123.144,333.98 U10.4@123.308,333.815
  Top Layer w0.3: R39.1@121.301,340.667 125.386,344.753 128.298,344.753 132.288,348.743 132.49,348.743 144.111,360.364 167.641,360.364 167.817,360.189 167.817,239.516 162.829,234.528 151.886,234.528 151.547,234.189 150.555,234.189 149.103,232.737 147.425,232.737 147.25,232.561 147.25,212.759 148.994,211.015 164.054,211.015 164.513,211.473 164.513,212.733 U11.25
NetR40_2: R40.2 U10.1 | length 12.3
  Top Layer w0.25: R40.2@118.596,345.575 118.596,345.348 120.344,343.6 U10.1
PWMA: U11.1 x.16 | length 106.6
  Top Layer w0.3: x.16 140.947,200.818 192.684,200.818 204.208,212.342 204.208,213.577 208.208,217.578 208.208,226.344 206.415,228.138 U11.1
PWMB: U11.5 x.10 | length 139.8
  Top Layer w0.3: x.10 150.279,194.91 150.279,195.697 150.455,195.873 192.595,195.873 212.59,215.867 212.59,216.116 212.475,216.232 212.475,227.37 205.284,234.561 v1(196.784,234.561) ; U11.5 192.633,228.381 194.315,230.063 v1(194.315,230.306)
  Bottom Layer w0.3: v1(194.315,230.306) 196.784,232.776 v1(196.784,234.561)
RN: pad.5 x.7 | length 141.1
  Top Layer w0.5: x.7 118.65,168.945 120.328,168.945 121.082,168.191 130.345,168.191 131.099,168.945 251.121,168.945 pad.5@252.003,169.827
RP: pad.4 x.6 | length 144.6
  Top Layer w0.5: x.6@114.08,176.259 121.394,168.945 130.033,168.945 138.781,177.693 pad.4
RX: U11.15 U12.2 | length 98.3
  Top Layer w0.3: U11.15 175.595,236.501 206.537,236.501 215.547,227.491 215.547,222.73 225.949,212.328 U12.2
STBY: U11.4 x.13 | length 126.5
  Top Layer w0.3: x.13 143.343,195.595 143.343,198.459 143.519,198.635 192.949,198.635 210.243,215.929 210.243,226.66 205.242,231.661 198.696,231.661 U11.4
TX: U11.14 U12.3 | length 94.5
  Top Layer w0.3: U11.14 177.485,235.85 206.081,235.85 214.329,227.602 214.329,222.121 224.515,211.935 224.515,201.17 223.409,200.065 U12.3
pads on no net: U11.8 U11.9 U11.10 U11.11 U11.12 U11.13 U11.16 U11.17 U11.18 U11.21 U11.22 U11.23 U11.24 U11.35 U11.36 U11.37 U11.38 U11.39 U11.40 U12.1 U12.6 x.9

## Polygon pours and split planes (outlines as drawn)
-IN on Bottom Layer "-IN_L02_P000" (solid, pour order 0): 85.201,159.619 85.201,198.901 85.201,198.916 ccw(c85.373,249.25) 134.801,239.744 167.399,239.744 167.516,239.627 167.516,359.748 144.434,359.748 129.546,344.86 129.504,344.86 129.504,329.86 ccw(c175.02,279.976) 114.524,309.983 114.504,309.993 114.504,344.86 114.518,344.874 114.518,351.045 138.338,374.864 cw(c160.011,364.992) 151.73,387.322 151.734,387.31 ccw(c156.774,380.236) 149.958,374.851 198.084,374.851 198.135,374.902 ccw(c191.957,380.57) 197.672,386.705 197.689,386.752 cw(c189.998,364.999) 210.832,374.913 234.506,351.239 234.506,344.992 234.504,344.99 234.504,310.685 ccw(c175,280) 219.518,330.004 219.518,344.99 204.784,359.724 204.761,359.748 182.516,359.748 182.516,239.627 214.984,239.627 ccw(c265.112,249.618) 264.993,198.505 264.993,159.62 264.994,159.619

## Other copper
Top Layer:

## Silkscreen, mask and mechanical layers (free items; w line width, h text height)
Top Overlay:
  lines w0.254: 84.927,198.906 84.927,159.623 264.719,159.623 ; 84.927,198.92 ccw(c85.098,249.254) 134.527,239.749 167.124,239.749 ; 114.23,309.997 114.23,329.864 114.23,344.864 114.244,344.878 114.244,351.049 138.063,374.869 cw(c159.737,364.996) 151.455,387.326 ; 114.25,309.987 cw(c174.745,279.98) 129.23,329.864 129.23,344.864 129.272,344.864 144.16,359.752 167.241,359.752 167.241,239.631 ; 151.46,387.314 ccw(c156.5,380.24) 149.684,374.855 197.809,374.855 ; 197.397,386.709 cw(c191.683,380.574) 197.86,374.906 ; 197.414,386.756 cw(c189.723,365.003) 210.558,374.917 234.232,351.243 234.232,344.996 234.23,344.994 234.23,330.008 234.23,310.689 ccw(c174.725,280.004) 219.244,330.008 219.244,344.994 204.51,359.728 204.51,359.752 ; 204.486,359.752 182.241,359.752 182.241,239.631 214.71,239.631 ; 214.699,239.621 214.71,239.631 ; 231.921,187.311 232.814,186.417 ; 232.824,189.865 232.824,186.422 233.763,187.361 ; 264.718,159.624 264.718,198.509 cw(c264.838,249.622) 214.71,239.631 ; 232.814,186.417 232.814,186.417
  text "+" at 199.307,185.439 h1.52
  text "GND" at 198.723,179.631 h1.52
  text "RP" at 251.086,179.424 h1.52
  text "LN" at 94.679,178.075 h1.52
  text "RN" at 250.899,171.501 h1.52
  text "LP" at 94.675,166.23 h1.52

## Text inside footprints (layer, text, board x,y; h text height)
U1: Bottom 3D Body "0.201in/5.105mm" at 106.491,354.11 h1 r180; Bottom 3D Body "0.1in/2.553mm" at 106.374,352.834 h1 r180; Bottom 3D Body "0.1in/2.54mm" at 133.982,354.11 h1 r180; Bottom 3D Body "0.264in/6.706mm" at 123.538,340.318 h1 r180; Bottom 3D Body "0.11in/2.8mm" at 122.303,348.573 h1 r180; Bottom 3D Body "Alt Padstyle 2: OX90Y60D30P" at 112.767,373.744 h1 r180; Bottom 3D Body "Alt Padstyle 1: OX60Y90D30P" at 112.767,371.839 h1 r180; Bottom 3D Body "Right Mtg Padstyle: RX50Y100D30P" at 110.072,369.934 h1 r180; Bottom 3D Body "Left Mtg Padstyle: RX50Y100D30P" at 110.649,368.029 h1 r180; Bottom 3D Body "3rd Mtg Padstyle: RX100Y50D40P" at 110.852,366.124 h1 r180; Bottom 3D Body "2nd Mtg Padstyle: RX50Y100D40P" at 110.852,364.219 h1 r180; Bottom 3D Body "1st Mtg Padstyle: RX80Y110D50P" at 111.038,362.314 h1 r180; Bottom 3D Body "Default Padstyle: EX54Y54D34P" at 111.801,360.409 h1 r180
U2: Bottom 3D Body "0.201in/5.105mm" at 115.533,364.065 h1 r180; Bottom 3D Body "0.1in/2.553mm" at 115.415,362.788 h1 r180; Bottom 3D Body "0.1in/2.54mm" at 143.023,364.065 h1 r180; Bottom 3D Body "0.264in/6.706mm" at 132.58,350.272 h1 r180; Bottom 3D Body "0.11in/2.8mm" at 131.345,358.527 h1 r180; Bottom 3D Body "Alt Padstyle 2: OX90Y60D30P" at 121.809,383.699 h1 r180; Bottom 3D Body "Alt Padstyle 1: OX60Y90D30P" at 121.809,381.794 h1 r180; Bottom 3D Body "Right Mtg Padstyle: RX50Y100D30P" at 119.114,379.889 h1 r180; Bottom 3D Body "Left Mtg Padstyle: RX50Y100D30P" at 119.69,377.984 h1 r180; Bottom 3D Body "3rd Mtg Padstyle: RX100Y50D40P" at 119.894,376.079 h1 r180; Bottom 3D Body "2nd Mtg Padstyle: RX50Y100D40P" at 119.894,374.174 h1 r180; Bottom 3D Body "1st Mtg Padstyle: RX80Y110D50P" at 120.08,372.269 h1 r180; Bottom 3D Body "Default Padstyle: EX54Y54D34P" at 120.843,370.364 h1 r180
U3: Bottom 3D Body "0.201in/5.105mm" at 138.372,370.053 h1 r180; Bottom 3D Body "0.1in/2.553mm" at 138.255,368.776 h1 r180; Bottom 3D Body "0.1in/2.54mm" at 165.863,370.053 h1 r180; Bottom 3D Body "0.264in/6.706mm" at 155.42,356.261 h1 r180; Bottom 3D Body "0.11in/2.8mm" at 154.184,364.516 h1 r180; Bottom 3D Body "Alt Padstyle 2: OX90Y60D30P" at 144.648,389.687 h1 r180; Bottom 3D Body "Alt Padstyle 1: OX60Y90D30P" at 144.648,387.782 h1 r180; Bottom 3D Body "Right Mtg Padstyle: RX50Y100D30P" at 141.953,385.877 h1 r180; Bottom 3D Body "Left Mtg Padstyle: RX50Y100D30P" at 142.53,383.972 h1 r180; Bottom 3D Body "3rd Mtg Padstyle: RX100Y50D40P" at 142.733,382.067 h1 r180; Bottom 3D Body "2nd Mtg Padstyle: RX50Y100D40P" at 142.733,380.162 h1 r180; Bottom 3D Body "1st Mtg Padstyle: RX80Y110D50P" at 142.92,378.257 h1 r180; Bottom 3D Body "Default Padstyle: EX54Y54D34P" at 143.682,376.352 h1 r180
U4: Bottom 3D Body "0.201in/5.105mm" at 148.607,370.139 h1 r180; Bottom 3D Body "0.1in/2.553mm" at 148.49,368.863 h1 r180; Bottom 3D Body "0.1in/2.54mm" at 176.098,370.139 h1 r180; Bottom 3D Body "0.264in/6.706mm" at 165.654,356.347 h1 r180; Bottom 3D Body "0.11in/2.8mm" at 164.419,364.602 h1 r180; Bottom 3D Body "Alt Padstyle 2: OX90Y60D30P" at 154.883,389.773 h1 r180; Bottom 3D Body "Alt Padstyle 1: OX60Y90D30P" at 154.883,387.868 h1 r180; Bottom 3D Body "Right Mtg Padstyle: RX50Y100D30P" at 152.188,385.963 h1 r180; Bottom 3D Body "Left Mtg Padstyle: RX50Y100D30P" at 152.764,384.058 h1 r180; Bottom 3D Body "3rd Mtg Padstyle: RX100Y50D40P" at 152.968,382.153 h1 r180; Bottom 3D Body "2nd Mtg Padstyle: RX50Y100D40P" at 152.968,380.248 h1 r180; Bottom 3D Body "1st Mtg Padstyle: RX80Y110D50P" at 153.154,378.343 h1 r180; Bottom 3D Body "Default Padstyle: EX54Y54D34P" at 153.917,376.438 h1 r180
U5: Bottom 3D Body "0.201in/5.105mm" at 158.914,370.095 h1 r180; Bottom 3D Body "0.1in/2.553mm" at 158.797,368.818 h1 r180; Bottom 3D Body "0.1in/2.54mm" at 186.405,370.095 h1 r180; Bottom 3D Body "0.264in/6.706mm" at 175.961,356.303 h1 r180; Bottom 3D Body "0.11in/2.8mm" at 174.726,364.558 h1 r180; Bottom 3D Body "Alt Padstyle 2: OX90Y60D30P" at 165.19,389.729 h1 r180; Bottom 3D Body "Alt Padstyle 1: OX60Y90D30P" at 165.19,387.824 h1 r180; Bottom 3D Body "Right Mtg Padstyle: RX50Y100D30P" at 162.495,385.919 h1 r180; Bottom 3D Body "Left Mtg Padstyle: RX50Y100D30P" at 163.071,384.014 h1 r180; Bottom 3D Body "3rd Mtg Padstyle: RX100Y50D40P" at 163.275,382.109 h1 r180; Bottom 3D Body "2nd Mtg Padstyle: RX50Y100D40P" at 163.275,380.204 h1 r180; Bottom 3D Body "1st Mtg Padstyle: RX80Y110D50P" at 163.461,378.299 h1 r180; Bottom 3D Body "Default Padstyle: EX54Y54D34P" at 164.224,376.394 h1 r180
U6: Bottom 3D Body "0.201in/5.105mm" at 168.756,370.089 h1 r180; Bottom 3D Body "0.1in/2.553mm" at 168.639,368.813 h1 r180; Bottom 3D Body "0.1in/2.54mm" at 196.247,370.089 h1 r180; Bottom 3D Body "0.264in/6.706mm" at 185.804,356.297 h1 r180; Bottom 3D Body "0.11in/2.8mm" at 184.568,364.552 h1 r180; Bottom 3D Body "Alt Padstyle 2: OX90Y60D30P" at 175.032,389.724 h1 r180; Bottom 3D Body "Alt Padstyle 1: OX60Y90D30P" at 175.032,387.819 h1 r180; Bottom 3D Body "Right Mtg Padstyle: RX50Y100D30P" at 172.338,385.914 h1 r180; Bottom 3D Body "Left Mtg Padstyle: RX50Y100D30P" at 172.914,384.009 h1 r180; Bottom 3D Body "3rd Mtg Padstyle: RX100Y50D40P" at 173.117,382.104 h1 r180; Bottom 3D Body "2nd Mtg Padstyle: RX50Y100D40P" at 173.117,380.199 h1 r180; Bottom 3D Body "1st Mtg Padstyle: RX80Y110D50P" at 173.304,378.294 h1 r180; Bottom 3D Body "Default Padstyle: EX54Y54D34P" at 174.066,376.389 h1 r180
U7: Bottom 3D Body "0.201in/5.105mm" at 191.097,364.196 h1 r180; Bottom 3D Body "0.1in/2.553mm" at 190.98,362.919 h1 r180; Bottom 3D Body "0.1in/2.54mm" at 218.588,364.196 h1 r180; Bottom 3D Body "0.264in/6.706mm" at 208.145,350.404 h1 r180; Bottom 3D Body "0.11in/2.8mm" at 206.909,358.659 h1 r180; Bottom 3D Body "Alt Padstyle 2: OX90Y60D30P" at 197.373,383.83 h1 r180; Bottom 3D Body "Alt Padstyle 1: OX60Y90D30P" at 197.373,381.925 h1 r180; Bottom 3D Body "Right Mtg Padstyle: RX50Y100D30P" at 194.679,380.02 h1 r180; Bottom 3D Body "Left Mtg Padstyle: RX50Y100D30P" at 195.255,378.115 h1 r180; Bottom 3D Body "3rd Mtg Padstyle: RX100Y50D40P" at 195.458,376.21 h1 r180; Bottom 3D Body "2nd Mtg Padstyle: RX50Y100D40P" at 195.458,374.305 h1 r180; Bottom 3D Body "1st Mtg Padstyle: RX80Y110D50P" at 195.645,372.4 h1 r180; Bottom 3D Body "Default Padstyle: EX54Y54D34P" at 196.407,370.495 h1 r180
U8: Bottom 3D Body "0.201in/5.105mm" at 200.073,354.1 h1 r180; Bottom 3D Body "0.1in/2.553mm" at 199.955,352.824 h1 r180; Bottom 3D Body "0.1in/2.54mm" at 227.563,354.1 h1 r180; Bottom 3D Body "0.264in/6.706mm" at 217.12,340.308 h1 r180; Bottom 3D Body "0.11in/2.8mm" at 215.884,348.563 h1 r180; Bottom 3D Body "Alt Padstyle 2: OX90Y60D30P" at 206.349,373.734 h1 r180; Bottom 3D Body "Alt Padstyle 1: OX60Y90D30P" at 206.349,371.829 h1 r180; Bottom 3D Body "Right Mtg Padstyle: RX50Y100D30P" at 203.654,369.924 h1 r180; Bottom 3D Body "Left Mtg Padstyle: RX50Y100D30P" at 204.23,368.019 h1 r180; Bottom 3D Body "3rd Mtg Padstyle: RX100Y50D40P" at 204.434,366.114 h1 r180; Bottom 3D Body "2nd Mtg Padstyle: RX50Y100D40P" at 204.434,364.209 h1 r180; Bottom 3D Body "1st Mtg Padstyle: RX80Y110D50P" at 204.62,362.304 h1 r180; Bottom 3D Body "Default Padstyle: EX54Y54D34P" at 205.383,360.399 h1 r180
U9: Bottom 3D Body "0.201in/5.105mm" at 205.587,333.129 h1 r180; Bottom 3D Body "0.1in/2.553mm" at 205.47,331.853 h1 r180; Bottom 3D Body "0.1in/2.54mm" at 233.078,333.129 h1 r180; Bottom 3D Body "0.264in/6.706mm" at 222.634,319.337 h1 r180; Bottom 3D Body "0.11in/2.8mm" at 221.399,327.592 h1 r180; Bottom 3D Body "Alt Padstyle 2: OX90Y60D30P" at 211.863,352.763 h1 r180; Bottom 3D Body "Alt Padstyle 1: OX60Y90D30P" at 211.863,350.858 h1 r180; Bottom 3D Body "Right Mtg Padstyle: RX50Y100D30P" at 209.168,348.953 h1 r180; Bottom 3D Body "Left Mtg Padstyle: RX50Y100D30P" at 209.744,347.048 h1 r180; Bottom 3D Body "3rd Mtg Padstyle: RX100Y50D40P" at 209.948,345.143 h1 r180; Bottom 3D Body "2nd Mtg Padstyle: RX50Y100D40P" at 209.948,343.238 h1 r180; Bottom 3D Body "1st Mtg Padstyle: RX80Y110D50P" at 210.134,341.333 h1 r180; Bottom 3D Body "Default Padstyle: EX54Y54D34P" at 210.897,339.428 h1 r180
U10: Bottom 3D Body "0.201in/5.105mm" at 100.654,333.072 h1 r180; Bottom 3D Body "0.1in/2.553mm" at 100.537,331.795 h1 r180; Bottom 3D Body "0.1in/2.54mm" at 128.145,333.072 h1 r180; Bottom 3D Body "0.264in/6.706mm" at 117.701,319.279 h1 r180; Bottom 3D Body "0.11in/2.8mm" at 116.466,327.534 h1 r180; Bottom 3D Body "Alt Padstyle 2: OX90Y60D30P" at 106.93,352.706 h1 r180; Bottom 3D Body "Alt Padstyle 1: OX60Y90D30P" at 106.93,350.801 h1 r180; Bottom 3D Body "Right Mtg Padstyle: RX50Y100D30P" at 104.235,348.896 h1 r180; Bottom 3D Body "Left Mtg Padstyle: RX50Y100D30P" at 104.811,346.991 h1 r180; Bottom 3D Body "3rd Mtg Padstyle: RX100Y50D40P" at 105.015,345.086 h1 r180; Bottom 3D Body "2nd Mtg Padstyle: RX50Y100D40P" at 105.015,343.181 h1 r180; Bottom 3D Body "1st Mtg Padstyle: RX80Y110D50P" at 105.201,341.276 h1 r180; Bottom 3D Body "Default Padstyle: EX54Y54D34P" at 105.964,339.371 h1 r180
U11: Top Overlay "5V" at 160.224,224.303 h1 r90; Top Overlay "B9" at 162.637,224.303 h1 r90; Top Overlay "B8" at 165.177,224.43 h1 r90; Top Overlay "3.3V" at 155.017,223.922 h1 r90; Top Overlay "GND" at 157.532,223.358 h1 r90; Top Overlay "A5" at 178.131,214.397 h1 r90; Top Overlay "A2" at 170.471,214.397 h1 r90; Top Overlay "A3" at 173.026,214.397 h1 r90; Top Overlay "A4" at 175.602,214.397 h1 r90; Top Overlay "RST" at 195.911,214.397 h1 r90; Top Overlay "B10" at 190.78,214.397 h1 r90; Top Overlay "B11" at 193.357,214.397 h1 r90; Top Overlay "A6" at 180.62,214.397 h1 r90; Top Overlay "A7" at 183.197,214.397 h1 r90; Top Overlay "B0" at 185.751,214.397 h1 r90; Top Overlay "B1" at 188.302,214.397 h1 r90; Top Overlay "3.3V" at 198.375,214.397 h1 r90; Top Overlay "B15" at 195.809,224.059 h1 r90; Top Overlay "A8" at 193.244,224.366 h1 r90; Top Overlay "A11" at 185.66,224.282 h1 r90; Top Overlay "B3" at 178.029,224.43 h1 r90; Top Overlay "A9" at 190.679,224.397 h1 r90; Top Overlay "A15" at 180.519,223.995 h1 r90; Top Overlay "A12" at 183.095,223.995 h1 r90; Top Overlay "A10" at 188.189,223.995 h1 r90; Top Overlay "VBAT" at 155.13,214.469 h1 r90; Top Overlay "B5" at 172.924,224.43 h1 r90; Top Overlay "B14" at 198.284,224.028 h1 r90; Top Overlay "B7" at 167.88,224.43 h1 r90; Top Overlay "B4" at 175.5,224.397 h1 r90; Top Overlay "B6" at 170.359,224.46 h1 r90; Top Overlay "C15" at 162.713,214.397 h1 r90; Top Overlay "C13" at 157.659,214.397 h1 r90; Top Overlay "C14" at 160.148,214.397 h1 r90; Top Overlay "A0" at 165.279,214.397 h1 r90; Top Overlay "A1" at 167.83,214.468 h1 r90; Top Overlay "GND" at 200.864,214.397 h1 r90; Top Overlay "B13" at 200.864,224.049 h1 r90; Top Overlay "GND" at 203.429,214.397 h1 r90; Top Overlay "B12" at 203.364,224.059 h1 r90